# Altium PCB Sensor_Box_LoRa.PCBDOC (part 1 of 2)
Units mil, origin at the board's own origin, x right, y up, seen from the top; angles counter-clockwise.
Board outline 895.86 x 2876.17 mil, 2 copper layers (Top, Bot), stack 61.855 mil thick; 48 components, 44 nets, 182 pads, 131 vias.
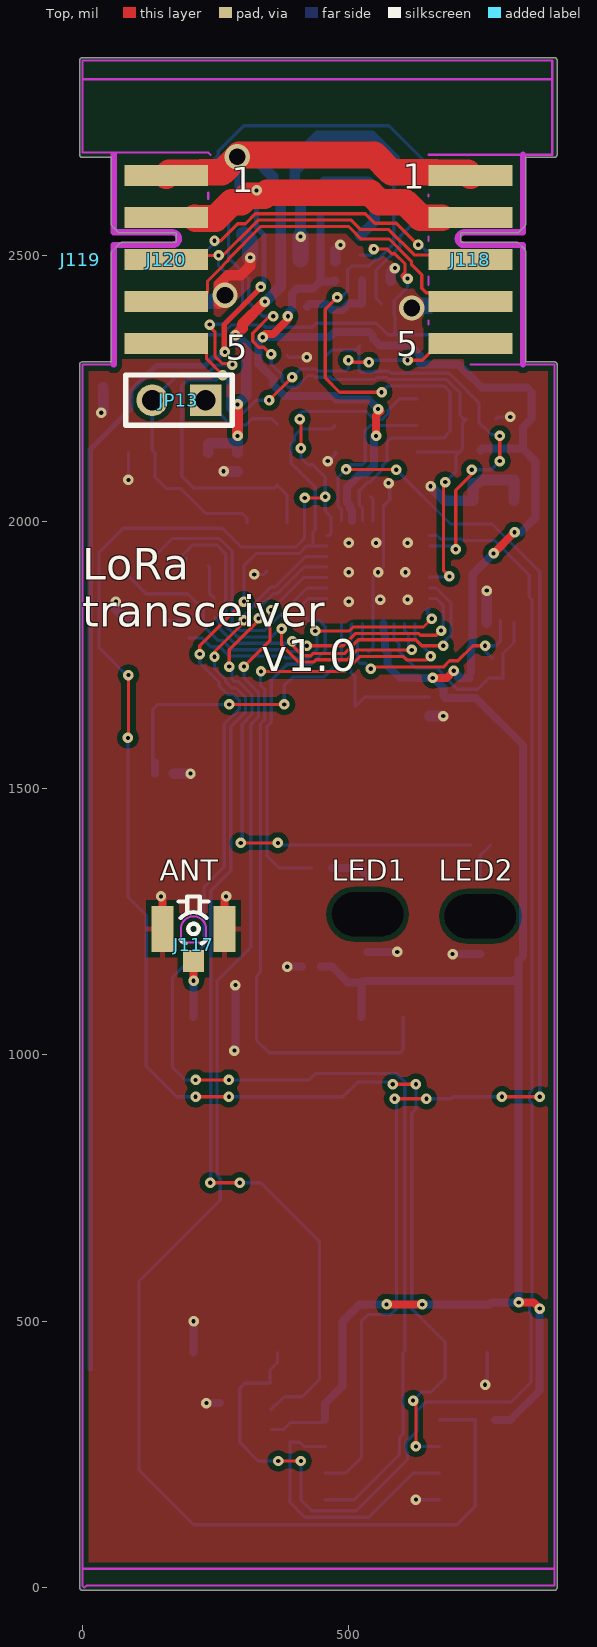
[diagram p0: Top view]
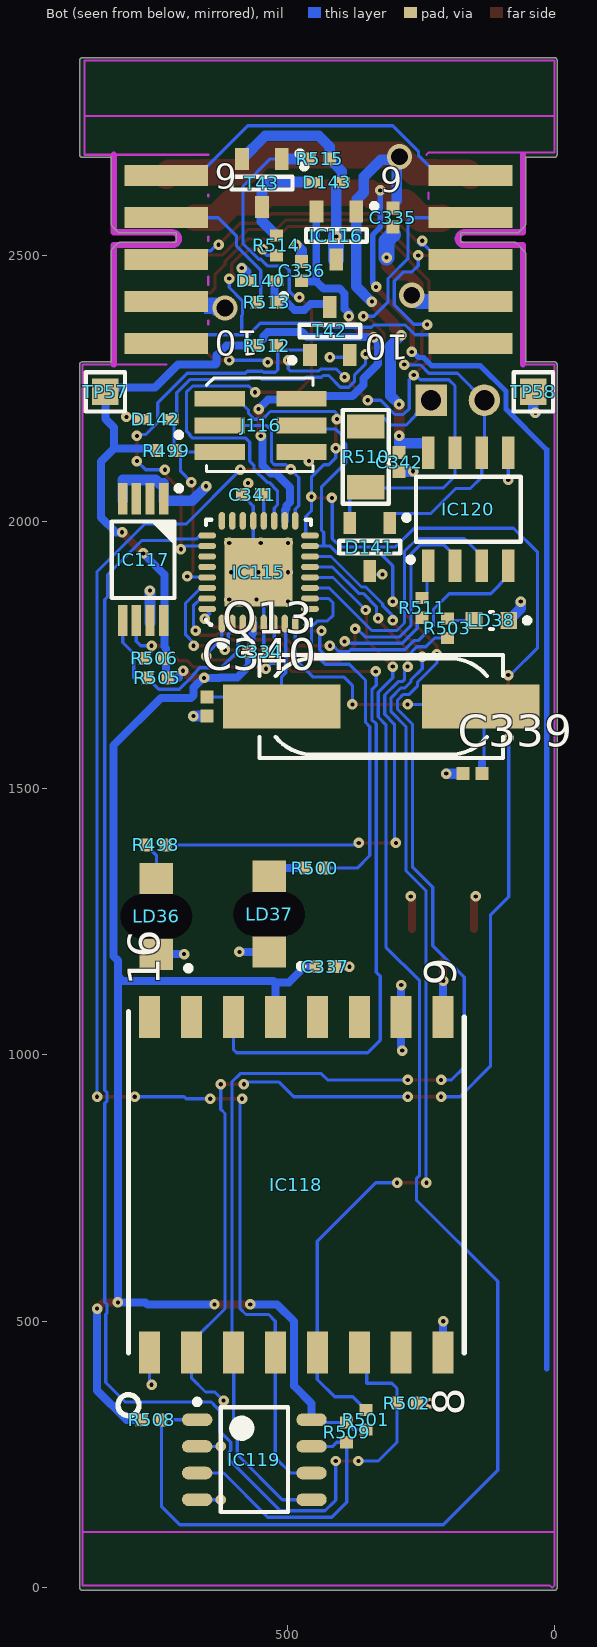
[diagram p1: Bot view, seen from below]
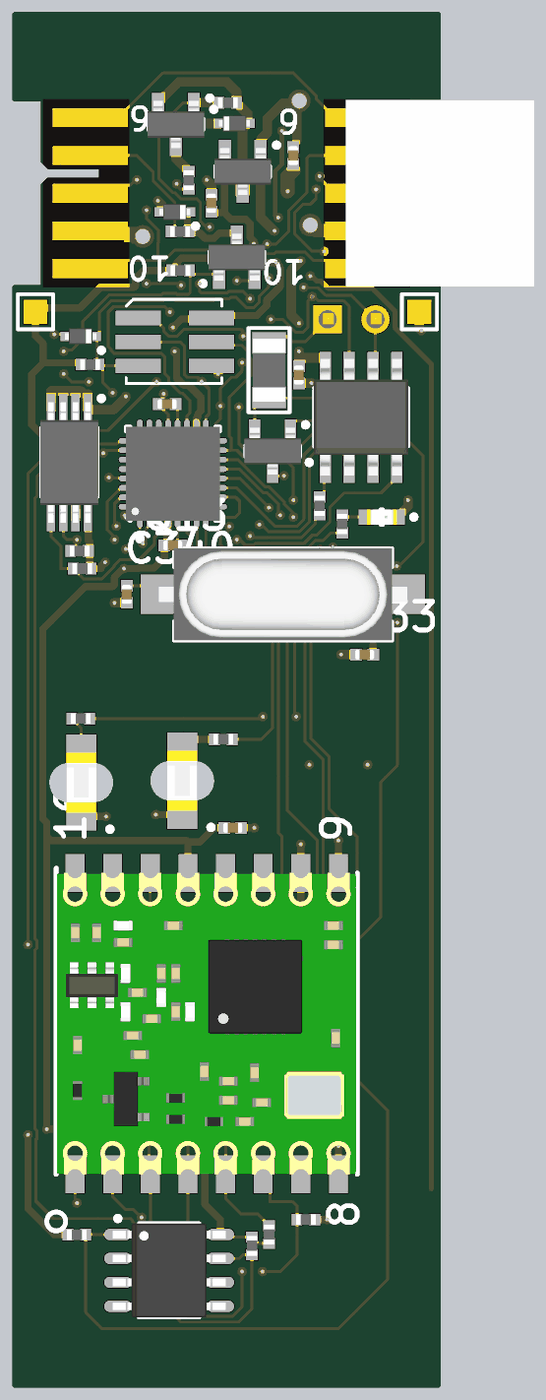
[diagram p2: 3D render of the assembled board from below, using the file's embedded part models]

## Layer stack, top to bottom
TopSolder: solder mask 0.4, Solder Resist, Dk 3.5
Top: signal copper 1.4
Dielectric1: core 59.0551, FR-4, Dk 4.8
Bot: signal copper 1.4
BottomSolder: solder mask 0.4, Solder Resist, Dk 3.5

## Board outline
-5.02,0 -5.02,2295.28 cw(c0,2295.28) 0,2300.29 54.04,2300.29 54.04,2503.94 cw(c59.06,2503.94) 55.53,2507.5 55.51,2507.48 71.26,2523.23 71.24,2523.21 cw(c74.8,2519.68) 74.8,2524.7 176.09,2524.7 176.09,2542.23 70.87,2542.23 cw(c70.87,2547.24) 67.3,2543.71 67.32,2543.7 55.51,2555.51 55.53,2555.49 cw(c59.06,2559.06) 54.04,2559.06 54.04,2683.96 0,2683.96 cw(c0,2688.98) -5.02,2688.98 -5.02,2866.14 ccw(c0,2866.14) -5.02,2866.14 cw(c0,2866.14) 0,2871.16 885.83,2871.16 cw(c885.83,2866.14) 890.84,2866.14 890.84,2688.98 cw(c885.83,2688.98) 885.83,2683.96 831.79,2683.96 831.79,2559.06 cw(c826.77,2559.06) 830.3,2555.49 830.32,2555.51 818.51,2543.7 818.52,2543.72 cw(c814.96,2547.24) 814.96,2542.23 709.74,2542.23 709.74,2524.7 814.96,2524.7 cw(c814.96,2519.69) 818.52,2523.21 818.51,2523.23 830.32,2511.42 830.3,2511.44 cw(c826.77,2507.87) 831.79,2507.87 831.79,2300.29 885.83,2300.29 cw(c885.83,2295.28) 890.84,2295.28 890.84,0 cw(c885.83,0) 885.83,-5.01 0.04,-5.01 cw(c0,0)

## Design rules (kind name [scope] priority, off if disabled: settings)
Clearance Clearance_DIFF [(InDifferentialPairClass('All Differential Pairs'))] p1: gap=5 ignorepadtopadclearanceinfootprint=FALSE except(0: Arc-Hole Track-Hole SMDPad-Hole THPad-Hole Via-Hole Fill-Hole Poly-Hole Region-Hole Text-Hole; 10: Arc-Poly Track-Poly SMDPad-Poly THPad-Poly Via-Poly Fill-Poly Poly-Poly Poly-Region Poly-Text)
Clearance [All] p2: gap=6 ignorepadtopadclearanceinfootprint=FALSE except(10: Arc-Poly Track-Poly SMDPad-Poly THPad-Poly Via-Poly Fill-Poly Poly-Poly)
DiffPairsRouting [All] p1: maxlimit=10 minlimit=5 mostfreqgap=5 toplayer_minwidth=5 toplayer_maxwidth=15 toplayer_prefwidth=10 bottomlayer_minwidth=5 bottomlayer_maxwidth=15 bottomlayer_prefwidth=10 maxuncoupledlength=500
FabricationTestPointUsage TestPointUsage [All] p1: valid=0 allowmultiple=FALSE
FabricationTestpoint Testpoint [All] p1: side=3 testpointundercomponent=TRUE minsize=40 maxsize=100 preferedsize=60 minholesize=20 maxholesize=40 preferedholesize=32 testpointgrid=1 allowsidetop=TRUE allowsidebottom=TRUE usegrid=TRUE gridtolerance=0.01
HoleSize [All] p1: absolutevalues=TRUE maxlimit=150 minlimit=1 maxpercent=80.000 minpercent=20.000
HoleToHoleClearance [All] p1: gap=1 allowstackedmicrovias=TRUE
MinimumSolderMaskSliver [All] p1: minsoldermaskwidth=0
PlaneClearance [All] p1: clearance=10
PlaneConnect [All] p1: planeconnectstyle=Direct reliefexpansion=20 reliefentries=4 reliefconductorwidth=10 reliefairgap=10
PolygonConnect PolygonConnect_pad [(InPadClass('All Pads'))] p1: connectstyle=Relief reliefconductorwidth=10 reliefentries=4 polygonreliefangle="90 Angle" airgapwidth=10
PolygonConnect [All] p2: connectstyle=Direct reliefconductorwidth=10 reliefentries=4 polygonreliefangle="45 Angle" airgapwidth=10
RoomDefinition Sensor_Box_LoRa [InComponentClass('Sensor_Box_LoRa')] p1 off: confinementstyle=ConfineIn formatcopy=TRUE lockcomponents=FALSE outline 793.29,1049.2 7988.16,1049.2 7988.16,1984.24 793.29,1984.24
RoutingVias [All] p1: holewidth=7.87 width=19.68 viastyle="Through Hole" minholewidth=7.87 minwidth=19.68 maxholewidth=28 maxwidth=50
SilkToSilkClearance [All] p1: silktosilkclearance=0
SilkToSolderMaskClearance SilkscreenOverComponentPads [IsPad] p1: minsilkscreentomaskgap=0 clearancetoexposedcopper=TRUE
SolderMaskExpansion [All] p1: expansion=2
Width [All] p1: maxlimit=50 minlimit=5 preferedwidth=5
20 further rules are at their usual default settings.

## Components (designator, comment, footprint, x,y, rotation, side; value= is the part's Value field where it differs from the comment)
C334 "100nF" CAPC1005X55N 555.12,1755.91 r0 bottom
C335 "1uF" CAPC1005X55N 303.15,2570.87 r90 bottom
C336 "1uF" CAPC1005X55N 474.41,2471.1 r270 bottom
C337 "100nF" CAPC1005X55N 429.91,1165.35 r0 bottom
C339 "18pF" CAPC1005X55N 153.75,1527.56 r180 bottom
C340 "18pF" CAPC1005X55N 651.62,1653.54 r90 bottom
C341 "1uF" CAPC1005X55N 567.15,2051.18 r0 bottom
C342 "100nF" CAPC1005X55N 291.34,2112.2 r270 bottom
D140 "PESD3V3S1UB" SODFL1608X65N 551.04,2452.76 r0 bottom
D141 "SM712" SOT95P237X112-3N 346.46,1952.76 r270 bottom
D142 "PESD3V3S1UB" SODFL1608X65N 748.03,2192.91 r0 bottom
D143 "PESD3V3S1UB" SODFL1608X65N 426.27,2637.8 r180 bottom
IC115 "ATMEGA328PB-MU" QFN50P500X500X100-33N-S325 555.12,1905.51 r90 bottom
IC116 "AP7313-33SAG-7" SOT95P240X130-3N 409.04,2537.4 r270 bottom
IC117 "M24256-BRDW6" SOP65P640X120-8N 771.65,1929.13 r270 bottom
IC118 "RFM95W-868S2" RFM95W 484.25,755.91 r90 bottom
IC119 "W25X40CLSNIG" SOIC127P600X135-8N 562.99,240.16 r180 bottom
IC120 "ST485ECDR" SOIC127P600X175-8N 161.42,2023.62 r90 bottom
J116 "ZL322-2X3P or PLHTD6S-TR-CV" ZL322-2X3P 551.18,2181.1 r270 bottom
J117 "U.FL" HIROSE_U.FL-R-SMT-1(10) 208.66,1236.22 r0 top
J118 "=Family" EDGE10T5B10_P200W1000L0F100X400 728.35,2334.65 r90 top
J119 "=Family" "AVX_00 9159 010 061 916" -3.94,2492.13 r180 top
J120 "=Family" EDGE10T1B6_P200W1000L0F100X400 157.48,2649.61 r270 top
JP13 "1798942 (goldpin 2x 2.54)" jump 231.3,2228.35 r270 top
LD36 "Green" LED_KINGBRIGHT_KPTR3216 746.85,1259.84 r270 bottom
LD37 "Green" LED_KINGBRIGHT_KPTR3216 535.43,1263.78 r270 bottom
LD38 "Green" LED_KINGBRIGHT_KPH-1608CGCK 118.11,1814.96 r0 bottom
Q13 "8.192MHz" XTAL_ABRACON_ABLS 324.8,1653.54 r0 bottom locked
R498 "10k" RESC1005X40N 747.72,1393.7 r0 bottom
R499 "10k" RESC1005X40N 728.35,2133.86 r180 bottom
R500 "10k" RESC1005X40N 449.6,1350.39 r0 bottom
R501 "10k" RESC1005X40N 353.88,315.16 r90 bottom
R502 "100k" RESC1005X40N 276.77,346.46 r0 bottom
R503 "10k" RESC1005X40N 200.79,1800.39 r90 bottom
R505 "10k" RESC1005X40N 744.78,1707.32 r0 bottom
R506 "10k" RESC1005X40N 750.51,1744.09 r0 bottom
R508 "10k" RESC1005X40N 755.91,314.96 r0 bottom
R509 "10k" RESC1005X40N 389.76,291.34 r270 bottom
R510 "120R" 1206R 353.88,2122.05 r90 bottom
R511 "1k" RESC1005X40N 248.03,1838.58 r90 bottom
R512 "100k" RESC1005X40N 539.37,2330.71 r0 bottom
R513 "49R9" RESC1005X40N 540.17,2412.07 r180 bottom
R514 "49R9" RESC1005X40N 521.73,2518.84 r90 bottom
R515 "10k" RESC1005X40N 440.1,2681.1 r180 bottom
T42 "BSS138LT1G" SOT95P240X110-3N 421.26,2358.27 r90 bottom
T43 "BSS138LT1G" SOT95P240X110-3N 548.69,2635.83 r270 bottom
TP57 "Test Point" TPS127 842.52,2244.09 r270 bottom
TP58 "Test Point" TPS127 39.37,2244.09 r270 bottom

## Footprints (in the part's own frame and the unit in brackets; to place one, negate y for a bottom-side part, rotate by r counter-clockwise, add the part's x,y. Pads: shape width x height; smd on the part's side, far side on the other; paste and mask are expansions set on the pad)
1206R [mm]
  rect 1.15x1.8 smd: 1(-1.45,0) 2(1.45,0)
  silkscreen extent -2.24,-1.09 2.24,1.09, body extent -1.67,-0.87 1.68,0.88, height 0.65
"AVX_00 9159 010 061 916" [mil] "10 Contacts, 2mm Pitch, Open Ended Card Edge Connector, 9159 Series"
  body extent -197,-195 197,195, height 67
CAPC1005X55N [mm] "Chip Capacitor, Body 1.0x0.55mm, IPC Medium Density"
  rect 0.62x0.62 smd: 1(-0.45,0) 2(0.45,0)
  body extent -0.52,-0.27 0.53,0.28, height 0.55
EDGE10T1B6_P200W1000L0F100X400 [mm] "10 contacts Board Edge Connector, First Left Top Pad 1, First Left Bottom Pad 2, Pitch 2mm, Length 0mm, Width 10mm, Finger Lenght 4mm, Finger Width 1mm"
  rect 1x4 smd paste-0.5: 1(0,0) 2(2,0) 3(4,0) 4(6,0) 5(8,0)
  rect 1x4 smd far side paste-0.5: 6(0,0) 7(2,0) 8(4,0) 9(6,0) 10(8,0)
  KeepOutLayer lines w0.3: 9,-2.5 3.3,-2.5 3.3,0.3 ccw(c3,0.3) 2.7,0.3 2.7,-2.5 -1,-2.5
EDGE10T5B10_P200W1000L0F100X400 [mm] "10 contacts Board Edge Connector, First Left Top Pad 5, First Left Bottom Pad 10, Pitch 2mm, Length 0mm, Width 10mm, Finger Lenght 4mm, Finger Width 1mm"
  rect 1x4 smd paste-0.5: 1(8,0) 2(6,0) 3(4,0) 4(2,0) 5(0,0)
  rect 1x4 smd far side paste-0.5: 6(8,0) 7(6,0) 8(4,0) 9(2,0) 10(0,0)
  KeepOutLayer lines w0.3: -1,-2.5 4.7,-2.5 4.7,0.3 cw(c5,0.3) 5.3,0.3 5.3,-2.5 9,-2.5
HIROSE_U.FL-R-SMT-1(10) [mm] "Up to 6GHz Ultra Small Surface Mount Male Coaxial Connectors U.FL Series"
  rect 1x1.05 smd: 1(0,-1.525)
  rect 1.05x2.2 smd: 2(-1.475,0) 2(1.475,0)
  Top keep-out lines w0.1: -0.6,-0.65 -0.6,0 cw(c0,0) 0.6,0 0.6,-0.65 -0.6,-0.65
  silkscreen extent -0.7,-0.69 0.7,1.55, body extent -1.5,-1.55 1.5,1.55, height 1.25
jump [mm]
  rect 1.5x1.5 hole 0.965: 1(0,0)
  round 1.5 hole 0.965: 2(0,-2.54)
  silkscreen extent -1.2,-3.81 1.2,1.27, body extent -1.26,-3.84 1.19,1.24, height 8
LED_KINGBRIGHT_KPH-1608CGCK [mm] "SMT Green LED, Case 0603, Body L 1.6 x W 0.8mm H 0.65mm"
  rect 0.8x0.8 smd: 1(-0.825,0) 2(0.825,0)
  silkscreen extent -1.82,-0.4 0.08,0.4, body extent -0.8,-0.4 0.8,0.4, height 0.65
LED_KINGBRIGHT_KPTR3216 [mm] "Reverse Mount LED 3216, Hole 2.1x2.3mm 0.35mm Height"
  rect 1.5x1.6 smd: 1(1.8,0) 2(-1.8,0)
  oval 1.9x3.2 hole 2.1 slot 3.4 at 90 deg unplated mask+0.1: 3(0,0)
  silkscreen extent 2.35,1.4 2.6,1.65, body extent -1.6,-0.8 1.6,0.8, height 0.25
QFN50P500X500X100-33N-S325 [mm] "QFN, (MO-220-VHHD-4) 0.50mm pitch,square; 8 pin X 8 pin, 5mm X 5mm X 1.00mm H body (w/thermal tab 3.25 X 3.25mm),  IPC Medium Density"
  oval 0.85x0.3 smd: 1(-2.45,1.75) 2(-2.45,1.25) 3(-2.45,0.75) 4(-2.45,0.25) 5(-2.45,-0.25) 6(-2.45,-0.75) 7(-2.45,-1.25) 8(-2.45,-1.75) 17(2.45,-1.75) 18(2.45,-1.25) 19(2.45,-0.75) 20(2.45,-0.25) 21(2.45,0.25) 22(2.45,0.75) 23(2.45,1.25) 24(2.45,1.75)
  oval 0.3x0.85 smd: 9(-1.75,-2.45) 10(-1.25,-2.45) 11(-0.75,-2.45) 12(-0.25,-2.45) 13(0.25,-2.45) 14(0.75,-2.45) 15(1.25,-2.45) 16(1.75,-2.45) 25(1.75,2.45) 26(1.25,2.45) 27(0.75,2.45) 28(0.25,2.45) 29(-0.25,2.45) 30(-0.75,2.45) 31(-1.25,2.45) 32(-1.75,2.45)
  rect 3.25x3.25 smd: 33(0,0)
  silkscreen extent -3.57,-2.5 2.5,2.5, body extent -2.5,-2.5 2.5,2.5, height 1
RESC1005X40N [mm] "Chip Resistor, EIA 0402, Metric 1005, Body 1.0x0.5mm, IPC Medium Density"
  rect 0.58x0.62 smd: 1(-0.47,0) 2(0.47,0)
  body extent -0.52,-0.27 0.53,0.28, height 0.4
RFM95W [mm] "RFM95W"
  rect 2x1 smd: 1(-8,7) 2(-8,5) 3(-8,3) 4(-8,1) 5(-8,-1) 6(-8,-3) 7(-8,-5) 8(-8,-7) 9(8,-7) 10(8,-5) 11(8,-3) 12(8,-1) 13(8,1) 14(8,3) 15(8,5) 16(8,7)
  silkscreen extent -11,-8 8.25,8.5, body extent -8,-7.95 8,7.95, height 2.29
SODFL1608X65N [mm] "Ultra Small Outline Diode Flat Lead (SOD-523), Body; 1.2mm L X 0.8mm W X 0.65mm H, IPC Medium Density"
  rect 0.75x0.5 smd: 1(-0.7,0) 2(0.7,0)
  silkscreen extent -1.22,0.63 -0.97,0.87, body extent -0.82,-0.42 0.83,0.43, height 0.65
SOIC127P600X135-8N [mm] "SOIC, 8-Leads, Body 4.90x3.90mm, Pitch 1.27mm, IPC Medium Density"
  oval 1.45x0.6 smd: 1(-2.725,1.905) 2(-2.725,0.635) 3(-2.725,-0.635) 4(-2.725,-1.905) 5(2.725,-1.905) 6(2.725,-0.635) 7(2.725,0.635) 8(2.725,1.905)
  silkscreen extent -2.85,-2.5 1.6,2.88, body extent -3,-2.5 3,2.5, height 1.35
SOIC127P600X175-8N [mm] "SOIC 8, Pitch 1.27mm - Body 4x5mm, IPC Medium Density"
  rect 1.55x0.6 smd: 1(-2.7,1.905) 2(-2.7,0.635) 3(-2.7,-0.635) 4(-2.7,-1.905) 5(2.7,-1.905) 6(2.7,-0.635) 7(2.7,0.635) 8(2.7,1.905)
  silkscreen extent -2.52,-2.5 1.55,2.88, body extent -3.1,-2.5 3.1,2.5, height 1.75
SOP65P640X120-8N [mm] "SOP, 0.65mm pitch; 8 pin, 4.40mm W X 3.00mm L X 1.20mm H body, IPC Medium Density"
  rect 1.5x0.45 smd: 1(-2.9,0.975) 2(-2.9,0.325) 3(-2.9,-0.325) 4(-2.9,-0.975) 5(2.9,-0.975) 6(2.9,-0.325) 7(2.9,0.325) 8(2.9,0.975)
  silkscreen extent -3.52,-1.5 1.83,1.82, body extent -3.2,-1.55 3.2,1.55, height 1.2
SOT95P237X112-3N [mm] "SOT, 0.95mm, pitch; 3 pin,1.30mm W X 2.92mm L X 1.12mm H body, IPC Medium Density"
  rect 1.05x0.6 smd: 1(-1.15,0.95) 2(-1.15,-0.95) 3(1.15,0)
  silkscreen extent -1.52,-1.45 0.3,1.87, body extent -1.25,-1.5 1.25,1.5, height 1.1
SOT95P240X110-3N [mm] "SOT23 3-Leads, Pitch 0.95mm, Body 1.3x2.9mm, IPC Medium Density"
  rect 1.05x0.65 smd: 1(-1.15,0.95) 2(-1.15,-0.95) 3(1.15,0)
  silkscreen extent -1.52,-1.45 0.3,1.92, body extent -1.25,-1.5 1.25,1.5, height 1.1
SOT95P240X130-3N [mm] "SOT23 3-Leads, Pitch 0.95mm - Body 1.3x2.9mm, IPC Medium Density"
  rect 1.05x0.65 smd: 1(-1.15,0.95) 2(-1.15,-0.95) 3(1.15,0)
  silkscreen extent -1.52,-1.45 0.3,1.92, body extent -1.25,-1.5 1.25,1.5, height 1.3
TPS127 [mil] "1.27 x  1.27mm SMD Test Point Area"
  rect 50x50 smd paste-50: 1(0,0)
  silkscreen extent -37,-37 37,37
XTAL_ABRACON_ABLS [mm] "HC/49US (AT49) SMD Cristal, Body 11.4x4.7mm, ABLS Serie"
  rect 5.6x2.1 smd: 1(-4.75,0) 2(4.75,0)
  silkscreen extent -5.8,-2.45 5.8,2.45, body extent -6.6,-2.45 6.6,2.45, height 4.2
ZL322-2X3P [mm] "SMT 1.27 mm dual goldpin"
  rect 0.76x2.4 smd: 1(-1.27,-1.95) 2(-1.27,1.95) 3(0,-1.95) 4(0,1.95) 5(1.27,-1.95) 6(1.27,1.95)
  silkscreen extent -2.25,-2.58 2.2,2.5, body extent -2.05,-2.15 2.03,2.15, height 4.5

## Part data
C334 C337: library part CC0402_100NF_16V_10%_X5R, "Non-polarised capacitor", Case=0402, Manufacturer=GENERIC, Manufacturer1 ComponentHeight=0.55mm, Manufacturer1 Example=MURATA, Manufacturer1 Part Number=GRM155R61C104KA88D, Tolerance=±10%, Voltage=16V, Author="CERN DEM JLC", Component Type=Standard, CreateDate=10.12.2013, HelpURL=\\cern.ch\dfs\Applications\Altium\Datasheets\CC0402_X5R_MURATA_GRM.pdf, LatestRevisionDate=10.12.2013, Manufacturer Part Number=CC0402_100NF_16V_10%_X5R, Mounted=Yes, Part Description="SMD Multilayer Chip Ceramic Capacitor", Part Number=CC0402_100NF_16V_10%_X5R, Pin Count=2, Sense=No, SMD=Yes, Socket=No, Status=None, TC=X5R
C335 C336 C341: library part CC0402_1UF_16V_10%_X5R, "Non-polarised capacitor", Case=0402, Manufacturer=GENERIC, Manufacturer1 ComponentHeight=0.55mm, Manufacturer1 Example=TDK, Manufacturer1 Part Number=C1005X5R1C105KT, Tolerance=±10%, Voltage=16V, Author="CERN DEM JLC", Component Type=Standard, CreateDate=25.10.2012, HelpURL=\\cern.ch\dfs\Applications\Altium\Datasheets\CC0402_X5R_TDK_C.pdf, LatestRevisionDate=25.10.2012, Manufacturer Part Number=CC0402_1UF_16V_10%_X5R, Mounted=Yes, Part Description="SMD Multilayer Chip Ceramic Capacitor", Part Number=CC0402_1UF_16V_10%_X5R, Pin Count=2, Sense=No, SMD=Yes, Socket=No, Status=Preferred, TC=X5R
C339 C340: library part CC0402_18PF_50V_5%_C0G, "Non-polarised capacitor", Case=0402, Manufacturer=GENERIC, Manufacturer1 ComponentHeight=0.55mm, Manufacturer1 Example=KEMET, Manufacturer1 Part Number=C0402C180J5GACTU, Tolerance=±5%, Voltage=50V, Author="CERN DEM JLC", Component Type=Standard, CreateDate=04.10.2016, HelpURL="\\cern.ch\dfs\Applications\Altium\Datasheets\CC0805_C0G_KEMET_(Commercial Grade).pdf", LatestRevisionDate=04.10.2016, Manufacturer Part Number=CC0402_18PF_50V_5%_C0G, Mounted=Yes, Part Description="SMD Multilayer Chip Ceramic Capacitor", Part Number=CC0402_18PF_50V_5%_C0G, Pin Count=2, Sense=No, SMD=Yes, Socket=No, Status=Preferred, TC=C0G/NP0
C342: library part CC0402_100NF_16V_10%_X7R, "Non-polarised capacitor", Case=0402, Manufacturer=GENERIC, Manufacturer1 ComponentHeight=0.55mm, Manufacturer1 Example=MURATA, Manufacturer1 Part Number=GRM155R71C104KA88D, Tolerance=±10%, Voltage=16V, Author="CERN DEM JLC", Component Type=Standard, CreateDate=05.12.2013, HelpURL=\\cern.ch\dfs\Applications\Altium\Datasheets\CC0402_X7R_MURATA_GRM.pdf, LatestRevisionDate=03.12.2007, Manufacturer Part Number=CC0402_100NF_16V_10%_X7R, Mounted=Yes, Part Description="SMD Multilayer Chip Ceramic Capacitor", Part Number=CC0402_100NF_16V_10%_X7R, Pin Count=2, Sense=No, SMD=Yes, Socket=No, Status="Not Recommended", TC=X7R
D140 D142 D143: "ESD protection diode", Case=SOD523, Manufacturer="NXP SEMICONDUCTORS", Power=330W, Voltage=3V3, Author="CERN DEM JLC", Bonding=No, ComponentHeight=0.65mm, Component Type=Standard, CreateDate=29.11.2012, Device=PESD3V3S1UB, HelpURL=\\cern.ch\dfs\Applications\Altium\Datasheets\PESD3V3S1UB.pdf, LatestRevisionDate=29.11.2012, Manufacturer Part Number=PESD3V3S1UB, Mounted=Yes, PackageDescription="Ultra Small Outline Diode Flat Lead (SOD-523), Body; 1.2mm L X 0.8mm W X 0.65mm H, IPC Medium Density", Part Description="ESD protection diode (23kV)", Part Number=PESD3V3S1UB, Pin Count=2, PressFit=No, Sense=No, SMD=Yes, Socket=No
D141: "Asymmetrical TVS Diode for Extended Common-Mode RS-485", Case=SOT-23, Manufacturer=SEMTECH, Power=400W, Voltage=12V/-7V, Author="CERN DEM JLC", Bonding=No, ComponentHeight=1.12mm, Component Type=Standard, CreateDate=23.04.2012, Device=SM712, HelpURL=\\cern.ch\dfs\Applications\Altium\Datasheets\SM712.pdf, LatestRevisionDate=23.04.2012, Manufacturer Part Number=SM712, Mounted=Yes, PackageDescription="SOT, 0.95mm, pitch; 3 pin,1.30mm W X 2.92mm L X 1.12mm H body, IPC Medium Density", Part Description="Asymmetrical TVS Diode for Extended Common-Mode RS-485", Part Number=SM712, Pin Count=3, PressFit=No, Sense=No, SMD=Yes, Socket=No, Status=Obsolete
IC115: "8-bit AVR 20MHz Microcontroller With 32K Bytes In-System  Programmable  Flash", Case=QFN32, Manufacturer=ATMEL, Author=GK, Bonding=No, ComponentHeight=1mm, Component Type=Standard, CreateDate=2011-02-08, Device=ATMEGA328PB-MU, HelpURL=\\cern.ch\dfs\Applications\Altium\Datasheets\ATMEGA328P-MU.pdf, LatestRevisionDate=2014-07-02, Manufacturer Part Number=ATMEGA328PB-MU, Mounted=Yes, PackageDescription="QFN, (MO-220-VHHD-2) 0.50mm pitch,square; 8 pin X 8 pin, 5mm X 5mm X 1.00mm H body (w/thermal tab 3.25 X 3.25mm),  IPC Medium Density", Part Description="8-bit AVR Microcontroller, 32KB Flash, 1KB EEPROM, 2KB SRAM, 32-pin MLF, Industrial Grade (-40°C to 85°C)", Part Number=ATMEGA328PB-MU, Pin Count=33, PressFit=No, Sense=No, SMD=Yes, Socket=No
IC116: "3-Terminal Regulator 1=IN 2=OUT 3=GND", Case=SOT23, Manufacturer="DIODES INCORPORATED", Author="CERN DEM JLC", Bonding=No, ComponentHeight=1.35mm, Component Type=Standard, CreateDate=20.03.2018, Device=AP7313-33SAG-7, HelpURL=\\cern.ch\dfs\Applications\Altium\Datasheets\AP7313-33SAG-7.pdf, LatestRevisionDate=20.03.2018, Manufacturer Part Number=AP7313-33SAG-7, Mounted=Yes, PackageDescription="SOT23 3-Leads, Pitch 0.95mm - Body 1.3x2.9mm, IPC Medium Density", Part Description="3.3V, 150mA Low Quiescent Current, Fast Transient Low Dropout Linear Regulator", Part Number=AP7313-33SAG-7, Pin Count=3, PressFit=No, Sense=No, SMD=Yes, Socket=No
IC117: "256-Kbit Serial I²C Bus EEPROM", Case=TSSOP8, Manufacturer="ST MICROELECTRONICS", Part Number=M24256-BRDW6P, Author="CERN DEM MR", Bonding=No, ComponentHeight=1.2mm, Component Type=Standard, CreateDate=17.03.2016, Device=M24256-BRDW6, HelpURL=\\cern.ch\dfs\Applications\Altium\Datasheets\M24256-BRDW6P.pdf, LatestRevisionDate=17.03.2016, Manufacturer Part Number=M24256-BRDW6, Mounted=Yes, PackageDescription="SOP, 0.65mm pitch; 8 pin, 4.40mm W X 3.00mm L X 1.20mm H body, IPC Medium Density", Part Description="256-Kbit Serial I²C Bus EEPROM", Pin Count=8, PressFit=No, Sense=No, SMD=Yes, Socket=No
IC118: "Low Power LoRa Transceiver Module", Manufacturer="HOPE MICROELECTRONICS", Author=GK, Bonding=No, ComponentHeight=1.52mm, Component Type=Standard, CreateDate=11.08.2016, Device=RFM95W-868S2, HelpURL=\\cern.ch\dfs\Applications\Altium\Datasheets\ERA-4XSM+.pdf, LatestRevisionDate=11.08.2016, Manufacturer Part Number=RFM95W-868S2, Mounted=Yes, PackageDescription="castellated module", Part Description="DC-3GHz Monolithic Amplifier", Part Number=RFM95W-868S2, Pin Count=16, PressFit=No, Sense=No, SMD=Yes, Socket=No
IC119: "4M-bit Serial Flash Memory with uniform 4KB sectors and Dual SPI and QPI", Case=SOIC8, Manufacturer=WINBOND, Author=GK, Bonding=No, ComponentHeight=2.16mm, Component Type=Standard, CreateDate=26/01/2018, Device=W25X40CLSNIG, HelpURL=\\cern.ch\dfs\Applications\Altium\Datasheets\W25Q128FVSIG.pdf, LatestRevisionDate=26/01/2018, Manufacturer Part Number=W25X40CLSNIG, Mounted=Yes, PackageDescription="SOIC, 8-Leads, Body 4.90x3.90mm, Pitch 1.27mm, IPC Medium Density", Part Description="4M-bit Serial Flash Memory with uniform 4KB sectors and Dual SPI", Part Number=W25X40CLSNIG, Pin Count=8, PressFit=No, Sense=No, SMD=Yes, Socket=No
IC120: "±15kV ESD-Protected, Low Power  RS-485/RS-422 Transceiver", Case=SOIC8, Manufacturer="ST MICROELECTRONICS", Author="CERN DEM MR", Bonding=No, ComponentHeight=1.75mm, Component Type=Standard, CreateDate=15.02.2018, Device=ST485ECDR, HelpURL=\\cern.ch\dfs\Applications\Altium\Datasheets\ST485ECDR.pdf, LatestRevisionDate=15.02.2018, Manufacturer Part Number=ST485ECDR, Mounted=Yes, PackageDescription="SOIC 8, Pitch 1.27mm - Body 4x5mm, IPC Medium Density", Part Description="±15kV ESD-Protected, Low Power  RS-485/RS-422 Transceiver", Part Number=ST485ECDR, Pin Count=8, PressFit=No, Sense=No, SMD=Yes, Socket=No
J116: library part "CON_2x3 1.27 SMT Male", "1.27 mm dual row goldpin (Maritex)"
J117: library part HIROSE_U.FL-R-SMT-1(10), Manufacturer="HIROSE (HRS)", Manufacturer Part Number=U.FL-R-SMT-1(10), Author="CERN DEM JLC", ComponentHeight=1.25mm, Component Type=Standard, CreateDate=24/03/2010, Family=U.FL, HelpURL=\\cern.ch\dfs\Applications\Altium\Datasheets\HIROSE_U.FL-R-SMT-1(10).pdf, LatestRevisionDate=24/03/2010, Mounted=Yes, Part Description="Up to 6GHz Ultra Small Surface Mount Male Coaxial Connectors U.FL Series", Part Number=HIROSE_U.FL-R-SMT-1(10), Pin Count=2, PressFit=No, Sense=No, SMD=Yes, Socket=No, Status=None
J118: library part EDGE10T5B10_P200W1000L0F100X400, "PCB Edge Connector 10 (2x5)", Author="CERN DEM MR", ComponentHeight=0mm, Component Type="Standard (No BOM)", CreateDate=14.02.2018, HelpURL=\\cern.ch\dfs\Applications\Altium\Datasheets\EDGE10T5B10_P200W1000L0F100X400.pdf, LatestRevisionDate=14.02.2018, Mounted=No, Part Description="10 Contacts Board Edge Connector, Pitch 2mm, Length 0mm, Width 10mm, Finger Lenght 4mm, Finger Width 1mm", Part Number=EDGE10T5B10_P200W1000L0F100X400, Pin Count=10, PressFit=No, Sense=No, SMD=No, Socket=No, Status=None
J119: library part "AVX_00 9159 010 061 916", "Open Ended Card Edge Connector, 9159 Series", Manufacturer=AVX, Manufacturer Part Number="00 9159 010 061 916", Author="CERN DEM MR", ComponentHeight=1.6mm, Component Type=Standard, CreateDate=13.02.2018, HelpURL="\\cern.ch\dfs\Applications\Altium\Datasheets\AVX_00 9159 010 061 916.pdf", LatestRevisionDate=13.02.2018, Mounted=Yes, Part Description="10 Contacts, 2mm Pitch, Open Ended Card Edge Connector, 9159 Series", Part Number="AVX_00 9159 010 061 916", Pin Count=10, PressFit=No, Sense=No, SMD=No, Socket=No, Status=None
J120: library part EDGE10T1B6_P200W1000L0F100X400, "PCB Edge Connector 10 (2x5)", Author="CERN DEM MR", ComponentHeight=0mm, Component Type="Standard (No BOM)", CreateDate=14.02.2018, HelpURL=\\cern.ch\dfs\Applications\Altium\Datasheets\EDGE10T1B6_P200W1000L0F100X400.pdf, LatestRevisionDate=14.02.2018, Mounted=No, Part Description="10 Contacts Board Edge Connector, Pitch 2mm, Length 0mm, Width 10mm, Finger Lenght 4mm, Finger Width 1mm", Part Number=EDGE10T1B6_P200W1000L0F100X400, Pin Count=10, PressFit=No, Sense=No, SMD=No, Socket=No, Status=None
JP13: library part JUMPER, "Jumper", Supplier Part Number 1=1798942, Supplier 1=Farnell
LD36 LD37: library part LED_KINGBRIGHT_KPTR-3216CGCK, "LED Green 1A 2C", Manufacturer=KINGBRIGHT, Manufacturer Part Number=KPTR-3216CGCK, Author="CERN DEM MR", Bonding=No, Color=Green, ComponentHeight=0.35mm, Component Type=Standard, CreateDate=15.02.2016, HelpURL=\\cern.ch\dfs\Applications\Altium\Datasheets\LED_KINGBRIGHT_KPTR-3216CGCK.pdf, LatestRevisionDate=15.02.2016, Mounted=Yes, PackageDescription="Reverse Mount LED 3216, Hole 2.1x2.3mm 0.35mm Height", Part Description="Reverse Mount LED 1.4x1.6mm Green", Part Number=LED_KINGBRIGHT_KPTR-3216CGCK, Pin Count=2, PressFit=No, Sense=No, SMD=Yes, Socket=No
LD38: library part LED_KINGBRIGHT_KPH-1608CGCK, "LED Green 1C 2A", Manufacturer=KINGBRIGHT, Manufacturer Part Number=KPH-1608CGCK, Author="CERN DEM JLC", Bonding=No, Color=Green, ComponentHeight=0.65mm, Component Type=Standard, CreateDate=03.07.2017, HelpURL=\\cern.ch\dfs\Applications\Altium\Datasheets\LED_KINGBRIGHT_KPH-1608CGCK.pdf, LatestRevisionDate=03.07.2017, Mounted=Yes, PackageDescription="SMT Green LED, Case 0603, Body L 1.6 x W 0.8mm H 0.65mm", Part Description="SMD Green LED, Case 1.6mmX0.8mm(0603), 0.65mm Thickness", Part Number=LED_KINGBRIGHT_KPH-1608CGCK, Pin Count=2, PressFit=No, Sense=No, SMD=Yes, Socket=No
Q13: library part XTAL_8.192MHZ_ABRACON_ABLS-8.192MHZ-B2-T, "Quartz Crystal", Manufacturer=ABRACON, Manufacturer Part Number=ABLS-8.192MHZ-B2-T, Author="CERN DEM MR", Bonding=No, ComponentHeight=4.2mm, Component Type=Standard, CreateDate=15.02.2018, HelpURL=\\cern.ch\dfs\Applications\Altium\Datasheets\XTAL_ABRACON_ABLS.pdf, LatestRevisionDate=15.02.2018, Mounted=Yes, PackageDescription="SMD Crystal, Body 11.40mm L X 4.70mm W X 4.20mm H, HC/49US (AT49) ALBS Series", Part Description="Tolerance: ± 20ppm, Stability: ± 50ppm, -20°C to +70°C, 18pF, 80 Ohms ESR, Low Profile Surface Mount Microprocessor Crystal, ABLS Series", Part Number=XTAL_8.192MHZ_ABRACON_ABLS-8.192MHZ-B2-T, Pin Count=2, PressFit=No, Sense=No, SMD=Yes, Socket=No
R498 R499 R500 R501 R503 R505 R506 R508 R509 R515: library part R0402_10K_1%_0.0625W_100PPM, "Resistor - 1%", Case=0402, Manufacturer=GENERIC, Manufacturer1 ComponentHeight=0.4mm, Manufacturer1 Example="YAGEO PHYCOMP", Manufacturer1 Part Number=232270671003L, Power=0.0625W, Tolerance=±1%, Author="CERN DEM JLC", Component Type=Standard, HelpURL=\\cern.ch\dfs\Applications\Altium\Datasheets\R0402_Phycomp_RC0402.pdf, Manufacturer Part Number=R0402_10K_1%_0.0625W_100PPM, Mounted=Yes, Part Description="General Purpose Thick Film Chip Resistor", Part Number=R0402_10K_1%_0.0625W_100PPM, Pin Count=2, SMD=Yes, Socket=No, TC=±100ppm/°C
  R498 R499 R500 R501 R503 R505 R506 R508 R509: CreateDate=03.12.2007, LatestRevisionDate=17.10.2012, PressFit=No, Sense=No, Status="Not Recommended"
  R515: CreateDate=2007-12-03, LatestRevisionDate=2012-10-17, Status="Not recommended", Table="Resistors SMD"
R502 R512: library part R0402_100K_1%_0.0625W_100PPM, "Resistor - 1%", Case=0402, Manufacturer=GENERIC, Manufacturer1 ComponentHeight=0.4mm, Manufacturer1 Example="YAGEO PHYCOMP", Manufacturer1 Part Number=232270671004L, Power=0.0625W, Tolerance=±1%, Author="CERN DEM JLC", Component Type=Standard, HelpURL=\\cern.ch\dfs\Applications\Altium\Datasheets\R0402_Phycomp_RC0402.pdf, Manufacturer Part Number=R0402_100K_1%_0.0625W_100PPM, Mounted=Yes, Part Description="General Purpose Thick Film Chip Resistor", Part Number=R0402_100K_1%_0.0625W_100PPM, Pin Count=2, PressFit=No, Sense=No, SMD=Yes, Socket=No, Status="Not Recommended", TC=±100ppm/°C
  R502: CreateDate=03/12/2007, LatestRevisionDate=17/10/2012
  R512: CreateDate=03.12.2007, LatestRevisionDate=17.10.2012
R510: library part RES_1206, "SMD Resistor", Supplier Part Number 1=39K0871, Supplier 1=Newark
R511: library part R0402_1K_1%_0.0625W_100PPM, "Resistor - 1%", Case=0402, Manufacturer=GENERIC, Manufacturer1 ComponentHeight=0.4mm, Manufacturer1 Example="YAGEO PHYCOMP", Manufacturer1 Part Number=232270671002L, Power=0.0625W, Tolerance=±1%, Author="CERN DEM JLC", Component Type=Standard, CreateDate=03.12.2007, HelpURL=\\cern.ch\dfs\Applications\Altium\Datasheets\R0402_Phycomp_RC0402.pdf, LatestRevisionDate=17.10.2012, Manufacturer Part Number=R0402_1K_1%_0.0625W_100PPM, Mounted=Yes, Part Description="General Purpose Thick Film Chip Resistor", Part Number=R0402_1K_1%_0.0625W_100PPM, Pin Count=2, PressFit=No, Sense=No, SMD=Yes, Socket=No, Status="Not Recommended", TC=±100ppm/°C
R513 R514: library part R0402_49R9_1%_0.0625W_100PPM, "Resistor - 1%", Case=0402, Manufacturer=GENERIC, Manufacturer1 ComponentHeight=0.4mm, Manufacturer1 Example="YAGEO PHYCOMP", Manufacturer1 Part Number="232270674999L or RC0402FR-0749R9L", Power=0.0625W, Tolerance=±1%, Author="CERN DEM JLC", Component Type=Standard, CreateDate=2012-10-24, HelpURL=\\cern.ch\dfs\Applications\Altium\Datasheets\R0402_Phycomp_RC0402.pdf, LatestRevisionDate=2012-10-24, Manufacturer Part Number=R0402_49R9_1%_0.0625W_100PPM, Mounted=Yes, Part Description="General Purpose Thick Film Chip Resistor", Part Number=R0402_49R9_1%_0.0625W_100PPM, Pin Count=2, SMD=Yes, Socket=No, Status="Not recommended", Table="Resistors SMD", TC=±100ppm/°C
T42 T43: "N-CHANNEL MOSFET WITH DIODE", Case=SOT23-3, Manufacturer="ON SEMICONDUCTOR", Author="CERN DEM JLC", Bonding=No, ComponentHeight=1.11mm, Component Type=Standard, CreateDate=23.03.2009, Device=BSS138LT1G, HelpURL=\\cern.ch\dfs\Applications\Altium\Datasheets\BSS138LT1G.pdf, LatestRevisionDate=23.03.2009, Manufacturer Part Number=BSS138LT1G, Mounted=Yes, PackageDescription="SOT23 3-Leads, Pitch 0.95mm - Body 1.4x3mm, IPC Medium Density", Part Description="50V 200mA N-Channel Enhancement Mode Field-Effect Transistor", Part Number=BSS138LT1G, Pin Count=3, PressFit=No, Sense=No, SMD=Yes, Socket=No
TP57 TP58: library part SMD_PAD_1.27X1.27MM, Author="CERN DEM JLC", ComponentHeight=0mm, Component Type="Standard (No BOM)", CreateDate=12.01.2008, Family="Test Point", HelpURL=Undefined, LatestRevisionDate=12.01.2008, Mounted=No, PackageDescription="1.27mm x 1.27mm PCB Copper Area (SMD Test Point)", Part Description="1.27mm x 1.27mm PCB Copper Area (SMD Test Point)", Part Number=SMD_PAD_1.27X1.27MM, Pin Count=1, Sense=No, SMD=Yes, Socket=No, Status=None

## Via types
v1: diameter 19.68, hole 7.87, Top to Bot, tented both sides, 126 vias
v2: diameter 47.24, hole 31.5, Top to Bot, tented both sides, 3 vias
v3: diameter 19.68, hole 7.87, Top to Bot, 2 vias

## Nets (pads, with @x,y where several pads share a name; then routed paths per layer and width w, separated by ;. In a path a pad name is that pad's centre, name@x,y a point inside that pad or via, vN(x,y) a via of type N, cw(c..) or ccw(c..) an arc to the next point about the centre after c; other vN are vias at no path point)
DEV_RESETn: IC115.26 R512.1 T42.1 | length 772
  Top w6: v1(700.79,1948.81) 700.79,2059.05 730.96,2089.23 v1(730.96,2097.74) ; v1(783.46,2114.17) v1(783.46,2161.42)
  Bot w6: T42.1 467.96,2322.29 512.45,2322.29 R512.1@519.03,2328.88 ; R512.1 R512.1@519.03,2328.88 ; IC115.26 694.88,1954.72 v1(700.79,1948.81) ; v1(730.96,2097.74) 767.03,2097.74 v1(783.46,2114.17) ; v1(783.46,2161.42) 780.85,2164.04 767.13,2164.04 744.24,2186.93 744.24,2223.69 688.87,2279.06 579.8,2279.06 576.06,2282.81 547.85,2282.81 545.68,2280.64 523.42,2280.64 519.03,2285.03 R512.1@519.03,2328.88
GND: C334.1 C335.1 C336.1 C337.1 C339.1 C340.1 C341.2 C342.2 D140.2 D141.3 D142.2 D143.2 IC115.5 IC115.21 IC115.33 IC116.3 IC117.1 IC117.2 IC117.3 IC117.4 IC117.7 IC118.1 IC118.8 IC118.10 IC119.4 IC120.5 J116.6 J117.2 J118.9 J120.9 LD36.1 LD37.1 LD38.1 R502.1 R515.2 T42.2 T43.2 TP58.1 | length 2677.4
  Top w15: v1(147.64,1297.24) 150.59,1294.29 J117.2@150.59,1236.22 ; J117.2@266.73,1236.22 266.73,1294.29 v1(269.69,1297.24)
  Top w20: v2@255.91,2409.45 255.91,2445.99 272.76,2462.85 297.49,2462.85 314.96,2480.31 v1(314.96,2496.06)
  Bot w6: IC120.5 86.61,2129.72 v1(86.61,2078.74) ; v1(322.63,1901.29) 340.26,1901.29 D141.3 ; T42.2 387.79,2309.06 v1(421.26,2309.06) ; v1(460.63,2114.17) 461.41,2114.17 476.38,2129.13 J116.6 ; C334.1 545.28,1763.78 IC115.5 545.28,1895.67 v1(555.12,1905.51) 564.96,1915.35 IC115.21 564.96,2029.57 576.77,2041.38 576.77,2070.66 v1(574.7,2072.74) ; v2@616.11,2418.16 657.48,2418.16 669.3,2429.98 711.76,2429.98 J118.9 662.23,2413.39 638.61,2389.76 v2@618.11,2389.76 ; v1(625.98,165.35) 626.18,165.16 IC119.4 ; v1(755.91,380.91) 759.84,384.84 IC118.1 ; D142.2 779.53,2196.85 v1(803.15,2196.85)
  Bot w15: IC118.8 v1(208.66,500) ; v1(232.75,346.46) R502.1 ; v1(285.4,1007.87) 287.4,1009.87 IC118.10 v1(287.4,1130.91) ; v1(384.69,1165.35) C337.1 ; LD37.1 v1(590.94,1192.91) ; v1(694.88,1188.98) LD36.1
  Bot w20: v1(35.43,2204.72) 39.37,2208.66 TP58.1@39.37,2252.28 ; v1(62.99,1850.39) 62.99,1837.6 LD38.1 ; C339.1 v1(203,1527.56) ; v2@255.91,2409.45 240.53,2409.45 ; v2@263.78,2417.32 232.66,2417.32 236.59,2413.39 ; v1(265.1,2095.14) 265.75,2094.49 C342.2 ; v1(409.45,2535.43) 409.45,2627.06 D143.2 398.71,2658.21 R515.2 421.6,2703.99 442.02,2724.41 542.78,2724.41 T43.2 ; C336.1 474.41,2509.84 v1(484.25,2519.68) ; D140.2 578.6,2468.36 v1(586.61,2476.37) ; C340.1 677.18,1635.83 v1(677.31,1635.7) ; v1(653.54,2066.92) 653.54,2065.82 679.99,2039.37 733.27,2039.37 IC117.1 733.27,2071.9 741.66,2071.9 748.51,2078.74 810.04,2078.74 IC117.4 IC117.4@810.04,2039.37 ; IC117.7@758.86,1811.02 IC117.7 v1(758.86,1871.06) ; 236.59,2413.39 J120.9 161.42,2409.45 240.53,2409.45 ; 236.59,2413.39 240.53,2409.45
  Bot w30: 303.15,2539.37 314.96,2527.56 v1(314.96,2496.06) ; IC116.3@409.45,2492.13 v1(409.45,2535.43)
  other v1: 500,1850.39 559.06,1854.33 610.24,1854.33 500,1905.51 606.3,1905.51 500,1960.63 551.18,1960.63 610.24,1960.63
  other v2: 618.11,2401.57 267.72,2425.2
INT: IC115.19 R515.1 T43.1 | length 1229.1
  Top w6: v1@478.35,2426.3 v1(478.35,2421.26) 455.85,2398.76 455.85,2270.12 482.53,2243.44 v1(561.55,2243.44) v1@561.55,2250.52
  Bot w6: v1(478.35,2421.26) 486.22,2421.26 497.53,2432.57 497.53,2472.08 505.37,2479.92 537.66,2479.92 550.71,2492.96 555.05,2492.96 584.33,2522.24 584.33,2630.11 533.34,2681.1 T43.1 ; IC115.19 525.59,2025.85 519.68,2031.76 519.68,2058.57 535.26,2074.14 539.05,2074.14 563.83,2098.92 563.83,2106.23 571.71,2114.1 571.71,2149.79 579.06,2157.14 678.92,2157.14 684.2,2162.41 684.2,2164.51 690.55,2170.87 690.55,2243.44 678.92,2255.06 573.18,2255.06 v1(561.55,2243.44)
  Bot w20: R515.1 T43.1
IO0: J118.10 J120.10 R514.1 | length 873.5
  Top w6: v1@541.41,2518.84 547.24,2513.01 v1(547.24,2511.81) 572.26,2511.81 580.98,2503.09 586.54,2503.09 605.46,2484.18 605.46,2468.57 600.25,2463.36 600.25,2459.35 602.91,2456.69 v1(610.23,2456.69)
  Bot w6: J120.10 174.17,2351.33 261.47,2351.33 279.53,2369.39 339.43,2369.39 343.42,2365.39 431.31,2365.39 438.84,2372.91 552.02,2372.91 573.6,2351.33 582.68,2351.33 ; R514.1 540.17,2500.33 547.24,2507.41 v1(547.24,2511.81) ; v1(610.23,2456.69) 610.23,2439.83 585.49,2415.08 585.49,2388.06 586.54,2387 586.54,2355.2 582.68,2351.33 ; J118.10 711.66,2351.33 582.68,2351.33
"MCU_D2_INT0 RFM69": IC115.1 IC118.14 | length 1459.3
  Top w6: v1(335.3,1719.29) 492.53,1719.29 520.43,1747.19 602.29,1747.19 608.48,1741 646.51,1741 v1(653.54,1748.03)
  Bot w6: v1(335.3,1719.29) 334.08,1718.07 334.08,1693.52 342.43,1685.16 342.43,1628.88 334.37,1620.82 334.37,1336.04 334.08,1335.75 334.08,1154.55 326.9,1147.38 326.9,1027.56 350.52,1003.94 596.36,1003.94 602.36,1009.94 IC118.14 ; IC115.1 624.02,1781.08 653.54,1751.56 v1(653.54,1748.03)
MCU_D6_LED1: IC115.10 R500.1 | length 715
  Bot w6: R500.1 369.99,1350.39 346.37,1374.02 346.37,1615.85 354.43,1623.91 354.43,1702.49 384.69,1732.75 429.91,1732.75 455.85,1758.69 455.85,1803.08 445.26,1813.66 444.81,1814.11 425.78,1814.11 415.25,1824.65 415.25,1847.84 423.71,1856.3 IC115.10
"MCU_D7-RFM69 RST": IC115.25 IC118.6 R502.2 | length 2755.7
  Top w6: v1(367.66,237.72) v1(410.31,237.72)
  Bot w6: IC118.6 366.14,421.64 352.14,407.64 352.14,383.63 304.89,383.63 295.28,374.02 R502.2 295.28,272.83 330.39,237.72 v1(367.66,237.72) ; v1(410.31,237.72) 410.31,164.39 430.36,144.35 514.43,144.35 610.24,240.16 610.24,254.26 607.14,257.35 607.14,272.96 627.95,293.77 627.95,331.62 639.51,343.18 639.51,344.43 643.5,348.43 805.12,348.43 841.77,385.07 841.77,513.47 839.43,515.82 839.43,531.43 843.78,535.78 843.78,909.1 839.43,913.45 839.43,929.06 843.78,933.42 843.78,1854.18 838.86,1859.1 838.86,1900.39 774.19,1965.05 714.06,1965.05 711.37,1967.75 672.29,1967.75 665.62,1974.41 IC115.25
"MCU_D8_FLASH SS": IC115.12 IC119.1 R508.1 | length 2791.3
  Top w6: v1(303.15,1728.34) 352.36,1777.56 352.36,1832.67 v1(354.33,1834.64)
  Bot w6: v1(303.15,1728.34) 303.15,1707.48 330.43,1680.19 330.43,1633.85 316.09,1619.51 316.09,1201.98 252.94,1138.84 252.94,773.7 259,767.65 259,727.5 106.3,574.8 106.3,220.47 208.66,118.11 702.66,118.11 737.4,152.85 R508.1 670.47,314.96 IC119.1 ; v1(354.33,1834.64) 415.36,1895.67 IC115.12
MCU_D9_LED2: IC115.13 R498.1 | length 1088.3
  Top w6: v1(275.59,1728.34) 275.59,1760.07 330.71,1815.19 v1(330.71,1818.89) ; v1(297.24,1397.64) v1(366.97,1397.64)
  Bot w6: v1@275.19,1727.95 v1(275.59,1728.34) 281.03,1722.9 281.03,1704.69 285.4,1700.32 293.34,1700.32 318.43,1675.22 318.43,1638.82 300.24,1620.63 300.24,1400.64 v1(297.24,1397.64) ; v1(330.71,1818.89) 333.99,1822.18 333.99,1840.95 358.85,1865.81 366.97,1865.81 416.51,1915.35 IC115.13 ; v1(366.97,1397.64) 370.9,1393.7 R498.1
"MCU_D10_RFM69 SS": IC115.14 IC118.5 R501.2 | length 1970.7
  Top w6: v1(240.16,759.84) v1(295.28,759.84) ; v1(248.03,1746.79) 248.03,1756.14 303.15,1811.25 v1(303.15,1814.96)
  Bot w6: v1(240.16,759.84) 240.94,760.63 240.94,1307.87 278.4,1345.33 278.4,1615.76 306.43,1643.79 306.43,1670.25 288.37,1688.32 280.43,1688.32 269.03,1699.72 269.03,1703.58 248.03,1724.58 v1(248.03,1746.79) ; v1(295.28,759.84) 334.98,759.84 444.88,649.94 IC118.5 444.88,390.68 412.47,358.27 378.49,358.27 R501.2 ; v1(303.15,1814.96) 303.15,1823.74 321.99,1842.59 321.99,1845.92 353.88,1877.81 362,1877.81 419.22,1935.04 IC115.14
MCU_D11_SPI_MOSI: IC115.15 IC118.3 IC119.5 J116.4 | length 2884.9
  Top w6: v1(212.6,952.76) v1(275.19,952.76) ; v1(220.47,1751.97) 220.47,1767.71 v1(303.15,1850.39)
  Bot w6: v1(212.6,952.76) 193.52,952.76 169.29,976.98 169.29,1145.67 228.35,1204.72 228.35,1314.46 266.4,1352.51 266.4,1620.73 294.43,1648.76 294.43,1665.28 283.39,1676.32 272.37,1676.32 257.03,1691.66 257.03,1698.61 220.47,1735.17 v1(220.47,1751.97) ; v1(275.19,952.76) 425.2,952.76 437.2,964.76 589.45,964.76 604.93,949.28 604.93,443.51 IC118.3 601.83,440.41 601.83,343.18 602.36,342.64 602.36,288.62 595.14,281.4 595.14,249.87 510.43,165.16 IC119.5 ; v1(303.15,1850.39) 303.15,1917.32 326.77,1940.94 407.48,1940.94 421.4,1954.87 432.93,1954.87 ; IC115.15 433.07,1954.72 432.93,1954.87 ; J116.4 467.38,2174.07 410.29,2174.07 398.31,2162.09 398.31,2152.77 393.04,2147.5 391.47,2145.92 391.47,2110.59 437.19,2064.87 437.19,1984.84 432.93,1980.58 432.93,1954.87
MCU_D12_SPI_MISO: IC115.16 IC118.2 IC119.2 J116.1 | length 3395.2
  Top w6: v1(85.63,1594.49) 86.61,1595.47 v1(86.61,1712.59) ; v1(212.6,921.26) v1(275.19,921.26) ; v1(408.01,2192.91) 410.31,2190.61 v1(410.31,2138.12) ; v1(417.32,2044.95) 453.73,2044.95 v1(456.03,2047.24) ; v1(582.68,944.88) v1(625.98,944.88) ; v1(620.67,350.98) 625.98,345.67 v1(625.98,265.16)
  Bot w6: v1(85.63,1594.49) 85.63,1296.26 120.08,1261.81 120.08,978.35 177.17,921.26 v1(212.6,921.26) ; v1(86.61,1712.59) 82.76,1712.59 31.5,1763.86 31.5,1942.91 76.77,1988.19 263.03,1988.19 298.27,1952.94 400.95,1952.94 416.67,1968.66 416.67,2044.29 v1(417.32,2044.95) 415.68,2044.95 v1@413.39,2047.24 ; v1(275.19,921.26) 488.94,921.26 516.49,948.82 578.74,948.82 v1(582.68,944.88) ; v1(408.01,2192.91) 408.01,2202.97 412.18,2207.14 532.91,2207.14 547.31,2192.74 562.92,2192.74 573.96,2203.77 573.96,2209.39 595.67,2231.1 J116.1 ; v1(410.31,2138.12) 410.31,2120.27 423.44,2107.14 432.53,2107.14 456.03,2083.65 v1(456.03,2047.24) 456.03,2020.45 466.49,2009.99 466.49,1977.09 463.8,1974.41 IC115.16 ; v1(620.67,350.98) 636.95,367.27 654.67,367.27 681.1,393.7 IC118.2 681.1,460.63 618.11,523.62 618.11,889.76 625.98,897.64 v1(625.98,944.88) ; v1(625.98,265.16) IC119.2
MCU_D13_SPI_SCK: IC115.17 IC118.4 IC119.6 J116.3 | length 2816.2
  Top w6: v1(494.84,2098.43) 588.49,2098.43 v1(589.17,2097.74) ; v3(586.09,917.32) v3(645.76,917.32) ; v1(787.4,921.26) v1(858.27,921.26)
  Bot w6: IC119.6 494.69,215.16 523.62,244.09 IC118.4 523.62,500 536.28,512.65 578.67,512.65 589.71,523.69 589.71,913.7 v3(586.09,917.32) ; IC115.17 486.22,2023.62 479.79,2030.05 479.79,2083.37 v1(494.84,2098.43) 503.56,2107.14 525.38,2107.14 530.83,2112.59 530.83,2171.65 539.92,2180.74 595.3,2180.74 595.67,2181.1 J116.3 ; v1(589.17,2097.74) 690.85,1996.06 768.77,1996.06 858.27,1906.56 v1(858.27,921.26) ; v3(645.76,917.32) 690.99,917.32 694.93,921.26 v1(787.4,921.26)
MODBUS_A: D141.1 IC120.6 J118.3 J120.3 JP13.2 | length 1465.2
  Top w6: J120.3@157.49,2492.12 165.36,2499.99 v1(255.62,2499.99) ; v1(238.95,2370.17) 238.95,2366.69 248.87,2356.77 248.87,2311.09 262.8,2297.16 279.75,2297.16 v1(281.65,2295.27) ; v1@255.63,2492.13 329.78,2566.28 504.59,2566.28 522.43,2548.43 575.14,2548.43 621.58,2501.99 622.73,2500.84 719.63,2500.84 J118.3
  Bot w6: JP13.2 181.83,2278.87 235.49,2278.87 251.05,2294.43 280.81,2294.43 v1(281.65,2295.27) ; JP13.2@131.89,2228.35 131.3,2227.76 131.3,2135.04 IC120.6 136.42,2084.05 157.87,2062.6 185.04,2062.6 231.94,2015.7 300.24,2015.7 309.06,2006.89 D141.1 ; v1@247.19,2371.83 248.1,2370.92 263.71,2370.92 300.34,2407.55 300.34,2451.63 282.9,2469.07 267.15,2469.07 255.62,2480.6 v1(255.62,2499.99)
MODBUS_B: D141.2 IC120.7 J118.5 J120.5 R510.1 | length 1269.5
  Top w6: J120.5 216.54,2334.65 233.22,2317.96 233.22,2306.15 v1(263.78,2275.59) ; v1(350.39,2228.34) v1(393.7,2271.65) ; v1(499.45,2303.14) 503.12,2299.48 v1(537.88,2299.48) ; v1@614.17,2311.02 610.24,2307.09 v1(610.24,2303.15) 637.8,2303.15 669.29,2334.65 J118.5
  Bot w6: v1(350.39,2228.34) 326.08,2228.34 299.21,2201.47 283.47,2201.47 272.34,2212.6 272.34,2267.03 v1(263.78,2275.59) 260.08,2275.59 251.36,2266.87 198.04,2266.87 186.42,2255.25 IC120.7 186.42,2085.4 207.98,2063.83 361.08,2063.83 366.14,2068.9 383.86,2051.18 D141.2 ; v1(393.7,2271.65) 408.77,2286.72 438.74,2286.72 442.14,2283.32 495.92,2283.32 499.45,2286.85 v1(499.45,2303.14) ; v1(537.88,2299.48) 541.54,2303.15 v1(610.24,2303.15)
MODBUS_DE: IC115.11 IC120.3 | length 537.8
  Bot w6: IC120.3 136.42,1936.02 169.23,1968.83 256.93,1968.83 281.24,1944.53 281.24,1810.22 295.34,1796.11 342.45,1796.11 422.32,1875.98 IC115.11
MODBUS_DI: IC115.31 IC120.4 | length 781.4
  Top w6: v1(421.26,1767.71) 490.04,1767.71 513.01,1790.68 630.88,1790.68 634.47,1787.1 664.29,1787.1 v1(673.23,1796.03)
  Bot w6: IC120.4 86.42,1898.62 119.74,1865.3 197.43,1865.3 226.83,1835.9 226.83,1804.93 254.13,1777.63 262.92,1777.63 280.43,1760.11 382.53,1760.11 385.9,1756.75 404.29,1756.75 415.25,1767.71 v1(421.26,1767.71) ; IC115.31 663.8,1856.3 677.31,1842.79 677.31,1800.11 v1(673.23,1796.03)
MODBUS_R_En: IC115.2 IC120.2 | length 736.1
  Top w6: v1(374.02,1799.21) 374.02,1768.63 405.77,1736.87 434.03,1736.87 438.42,1741.26 497.53,1741.26 516.11,1759.84 v1(618.11,1759.84)
  Bot w6: IC120.2 IC120.2@186.42,1922.88 ; IC120.2@195.23,1931.69 IC120.2@186.42,1922.88 ; v1(374.02,1799.21) 370.31,1799.21 355.21,1784.11 290.37,1784.11 269.24,1805.25 269.24,1939.55 251.96,1956.83 207.23,1956.83 186.42,1936.02 IC120.2@186.42,1922.88 ; IC115.2 604.33,1796.66 612.02,1788.97 612.02,1765.93 v1(618.11,1759.84)
MODBUS_RO: IC115.30 R511.1 | length 627.5
  Top w6: v1(393.7,1775.59) 393.7,1768.62 413.45,1748.87 429.06,1748.87 433.45,1753.26 492.56,1753.26 517.98,1778.68 625.91,1778.68 636.88,1767.71 v1(677.16,1767.71)
  Bot w6: R511.1 248.82,1820.08 257.24,1811.66 257.24,1800.28 285.4,1772.11 390.22,1772.11 v1(393.7,1775.59) ; IC115.30 663.8,1875.98 692.07,1847.71 692.07,1788.22 677.16,1773.32 v1(677.16,1767.71)
NetC339_2: C339.2 IC115.8 Q13.1 | length 627.2
  Top w6: v1(275.59,1657.48) 371.19,1657.48 375.12,1653.54 v1(379.06,1657.48)
  Bot w6: C339.2 132.19,1531.4 132.19,1647.94 Q13.1 141.73,1657.48 v1(275.59,1657.48) ; v1(379.06,1657.48) 379.06,1693.18 394.63,1708.75 452.84,1708.75 486.22,1742.13 IC115.8
  Bot w15: C339.2 136.04,1548.63
NetC340_2: C340.2 IC115.7 Q13.2 | length 306.5
  Bot w6: IC115.7 504.2,1807.35 504.2,1716.8 511.81,1709.18 Q13.2 529.53,1671.26 C340.2
NetC341_1: C341.1 IC115.20 | length 46.9
  Bot w6: C341.1@541.34,2047.24 545.28,2043.31 IC115.20
NetD140_1: D140.1 R513.2 T42.3 | length 157.9
  Bot w15: T42.3 426.27,2408.55 458.04,2408.55 468.68,2397.92 488.02,2397.92 499.55,2409.45 524.8,2409.45 D140.1@524.8,2452.56
NetD143_1: D143.1 R514.2 T43.3 | length 199.6
  Bot w20: D143.1 536.87,2637.8 548.69,2625.98 T43.3 548.69,2564.3 R514.2
NetIC115_32: IC115.32 R503.1 | length 555
  Top w6: v1(437.01,1795.27) 500.63,1795.27 508.04,1802.68 640.19,1802.68 v1(655.81,1818.3)
  Bot w6: R503.1 224.98,1781.89 241.24,1765.63 257.94,1765.63 275.46,1748.11 377.56,1748.11 380.93,1744.75 424.94,1744.75 440.1,1759.91 440.1,1788.47 437.01,1791.57 v1(437.01,1795.27) ; IC115.32 648.45,1836.61 645.76,1833.93 649.61,1830.09 646.81,1827.3 v1(655.81,1818.3)
NetIC118_9: IC118.9 J117.1 | length 105.3
  Top w15: v1(208.66,1138.84) J117.1
  Bot w15: IC118.9 v1(208.66,1138.84)
NetIC119_3: IC119.3 IC119.7 R509.2 | length 508.1
  Bot w6: IC119.7 415.94,265.16 408.27,272.83 R509.2 389.76,160.19 417.61,132.35 537.86,132.35 620.67,215.16 IC119.3
NetIC120_1: IC120.1 R511.2 | length 65.5
  Bot w6: IC120.1 238.83,1914.91 238.83,1865.5 247.24,1857.09 R511.2
NetJ118_4: J118.4 J120.4 | length 720.7
  Top w6: J120.4 174.07,2429.98 235.09,2429.98 235.09,2452.05 264.89,2481.85 264.89,2482.62 274.46,2492.19 274.46,2493.99 334.75,2554.28 499.62,2554.28 523.25,2530.65 536.25,2530.65 536.44,2530.84 575.77,2530.84 617.46,2489.15 617.46,2483.58 636.95,2464.08 636.95,2438.09 645.06,2429.98 711.76,2429.98 J118.4
NetJ118_6: J118.6 J120.6 | length 652.9
  Bot w6: J120.6 216.54,2649.61 255.21,2688.28 255.21,2695.67 302.95,2743.41 575.49,2743.41 669.29,2649.61 J118.6
NetJ118_7: J118.7 R513.1 | length 296.2
  Bot w6: R513.1@561.29,2409.45 R513.1 551.04,2419.7 551.04,2471.98 596.33,2517.27 596.33,2536.36 630.83,2570.87 J118.7
NetJ118_8: J118.8 J120.8 | length 657.4
  Top w6: v1(248.03,2527.55) 259.55,2527.55 291.61,2559.61 306.14,2559.61 324.81,2578.28 530.98,2578.28 548.82,2560.43 589.17,2560.43 629.61,2519.99 v1(630.23,2519.99)
  Bot w6: J120.8 216.63,2492.13 243.34,2518.84 250.88,2518.84 255.62,2523.57 251.64,2527.55 v1(248.03,2527.55) ; v1(630.23,2519.99) 633.32,2519.99 644.59,2508.72 652.61,2508.72 669.2,2492.13 J118.8
NetJP13_1: JP13.1 R510.2 | length 164.7
  Bot w6: JP13.1 257.83,2201.82 260.34,2201.82 260.34,2199.76 278.5,2181.6 306.36,2181.6 318.36,2193.6 355.61,2193.6 R510.2@366.14,2183.07
NetLD36_2: LD36.2 R498.2 | length 71
  Bot w6: LD36.2 746.85,1374.33 R498.2
NetLD37_2: LD37.2 R500.2 | length 73.9
  Bot w15: R500.2 519.69,1350.39 LD37.2
NetLD38_2: LD38.2 R503.2 | length 51.8
  Bot w6: LD38.2 196.85,1814.96 R503.2
P3V3: C334.2 C336.2 C337.2 IC115.4 IC115.18 IC116.2 IC117.8 IC118.13 IC119.8 J116.2 R499.1 R501.1 R505.1 R506.1 R508.2 R509.1 R512.2 TP57.1 | length 5085.4
  Top w15: v1(338.58,2346.46) 338.58,2347.72 343.1,2352.24 357.69,2352.24 385.83,2380.37 v1(385.83,2385.82) ; v1(551.18,2161.41) 551.18,2199.52 v1@559.18,2207.52 ; v1(570.87,531.5) v1(637.8,531.5) ; v1(657.48,1707.32) 683.7,1707.32 v1(696.85,1720.47) ; v1(771.65,1940.94) v1(811.09,1980.38) ; v1(818.9,535.43) 846.46,535.43 v1(858.27,523.62)
  Bot w6: R501.1 376.57,296.65 R509.1 450.39,309.84 IC119.8
  Bot w15: v1(385.83,2385.82) 385.83,2392.18 393.42,2399.78 393.42,2428.26 402.87,2437.71 433.43,2437.71 446.85,2451.13 ; IC116.2@446.85,2568.9 446.85,2451.13 ; C337.2 468.91,1165.35 498.45,1135.82 523.62,1135.82 ; IC119.8 455.71,345.88 488.19,378.36 488.19,499.3 520.38,531.5 v1(570.87,531.5) ; C336.2 472.15,2451.13 446.85,2451.13 ; IC115.18 505.91,2022.21 502.72,2025.39 502.72,2030.46 496.34,2036.84 496.34,2064.78 522.2,2090.64 532.22,2090.64 547.33,2105.76 547.33,2161.5 547.42,2161.41 v1(551.18,2161.41) ; IC118.13 523.62,1135.82 ; v1(555.12,2211.58) 537.46,2229.24 476.27,2229.24 J116.2 474.41,2236.31 379.06,2236.31 358.36,2257.01 358.36,2268.97 330.99,2296.34 330.99,2337.59 338.58,2345.19 v1(338.58,2346.46) 339.29,2347.16 464.11,2347.16 473.36,2356.41 537.88,2356.41 545.78,2348.51 545.78,2343.59 557.87,2331.5 R512.2 615.69,2330.71 633.58,2312.82 633.58,2297.62 635.64,2295.56 706.18,2295.56 749.47,2252.28 834.34,2252.28 TP57.1 842.52,2193.19 826.49,2177.17 826.49,2137.52 ; IC115.4 565.24,1808.78 565.24,1790.19 568.13,1787.3 568.13,1760.61 C334.2 572.83,1730.31 594.77,1708.38 627.64,1708.38 628.7,1707.32 v1(657.48,1707.32) 659.06,1707.32 677.33,1689.06 677.33,1674.27 681.98,1669.62 738.37,1669.62 827.28,1580.71 827.28,1185.04 818.9,1176.66 818.9,1147.7 ; v1(637.8,531.5) 763.78,531.5 767.72,535.43 v1(818.9,535.43) 818.9,1147.7 ; v1(696.85,1720.47) 704.72,1712.59 704.72,1708.33 705.73,1707.32 R505.1 ; R505.1@729.19,1718.38 729.19,1761.42 728.35,1762.26 732,1765.92 732,1901.29 v1(771.65,1940.94) ; R499.1 750.51,2137.52 826.49,2137.52 ; R508.2 803.15,314.96 858.27,370.08 v1(858.27,523.62) ; v1(811.09,1980.38) 822.9,1980.38 850.58,2008.06 850.58,2113.43 826.49,2137.52 ; 523.62,1135.82 526.65,1138.84 810.04,1138.84 818.9,1147.7
P5V0: C335.2 C342.1 IC116.1 IC120.8 J118.1 J120.1 | length 1404.5
  Top w20: v1(287.4,2350.39) 300.53,2363.51 300.53,2371.39 v1@339.52,2410.38 ; v1(291.34,2161.41) v1(291.34,2220.47)
  Top w50: J120.1 162.8,2654.92 222.47,2654.92 223.56,2656.01 261.69,2656.01 v2(290.72,2685.04) 294.1,2688.42 548.11,2688.42 580.53,2656.01 662.27,2656.01 663.36,2654.92 723.03,2654.92 J118.1
  Bot w20: IC120.8 236.42,2145.83 238.23,2147.64 291.34,2147.64 ; v1(287.4,2350.39) 307.49,2330.3 307.49,2295.55 307.49,2236.62 v1(291.34,2220.47) ; v2(290.72,2685.04) v2@295.93,2679.83 ; C342.1 291.34,2147.64 ; v1(291.34,2161.41) 291.34,2147.64 ; 295.93,2602.36 v2@295.93,2679.83 ; v1(342.52,2413.38) 343.63,2413.38 372.05,2441.8 372.05,2568.9 372.05,2594.49 370.24,2596.3 370.24,2605.57 357.69,2618.11 357.69,2647.35 325.22,2679.83 v2@295.93,2679.83
P12V0: J118.2 J120.2 | length 2917.3
  Top w10: v1(267.72,2318.9) 266.4,2320.21 266.4,2370.56 334.65,2438.8 v1(334.65,2440.94)
  Top w50: J120.2@211.22,2570.87 212.69,2569.39 249.88,2569.39 280.49,2600.01 298.46,2600.01 310.72,2612.28 341.61,2612.28 346.95,2617.62 539.72,2617.62 557.33,2600.01 605.34,2600.01 634.48,2570.87 J118.2@674.61,2570.87